# EAGLE board TSAL_2016 (EAGLE 7.5.0)
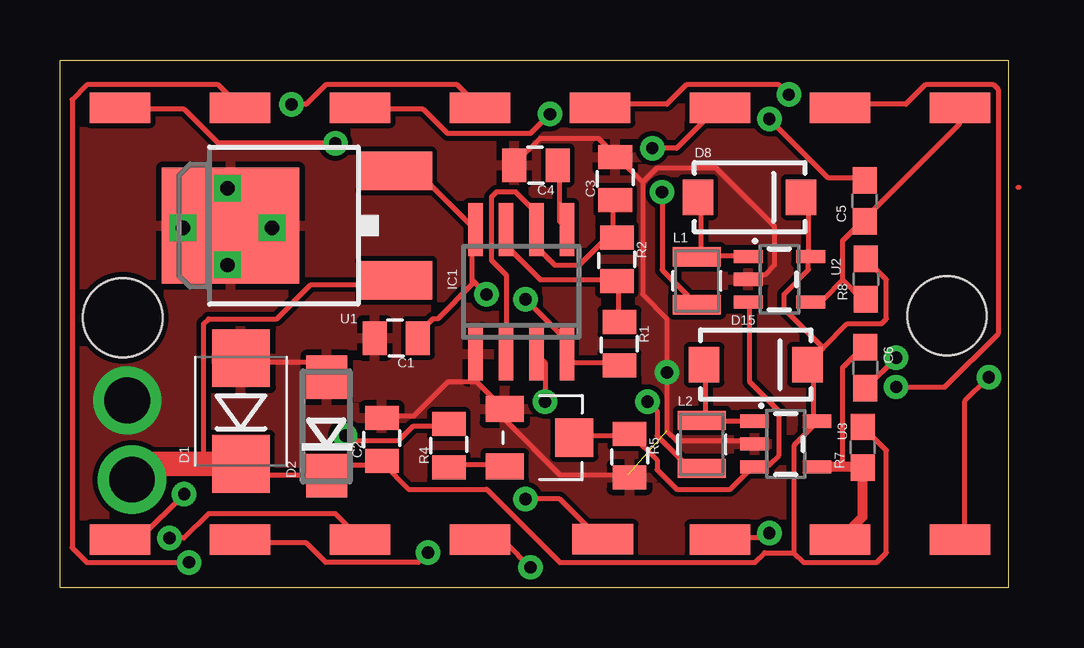
[diagram p0: board, top side]
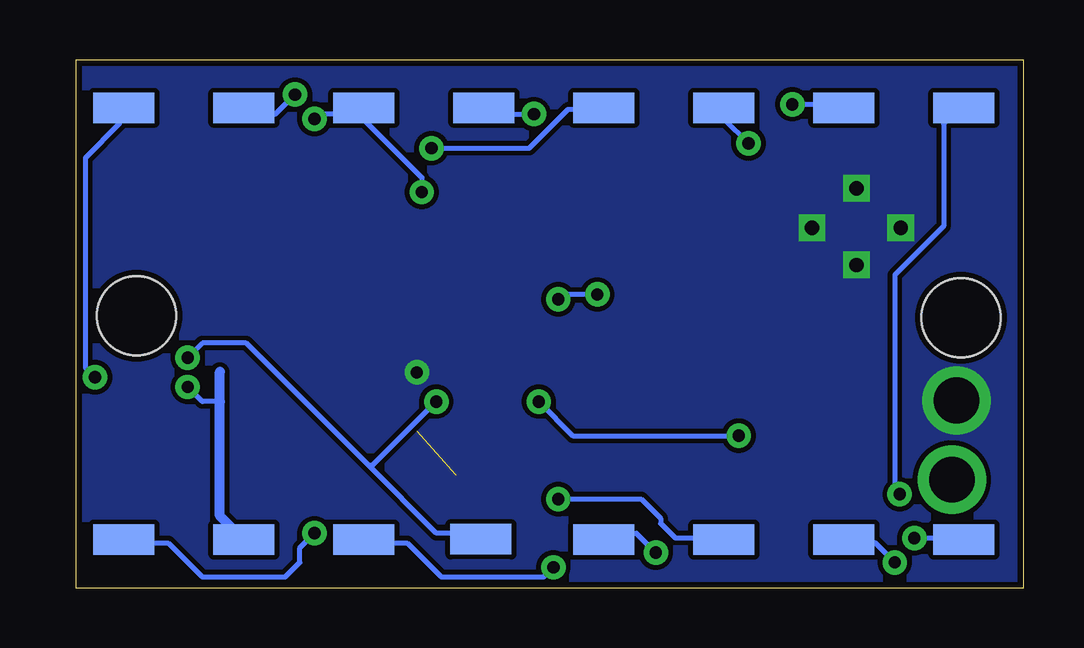
[diagram p1: board, bottom side, seen from below]

Size 39.5 x 22 mm. Coordinates in mm from the lower left corner, seen from the top.
Outline: 0,0 0,22 39.5,22 39.5,0 0,0
Copper layers (1*16): Top 0.035mm / dielectric 1.5mm / Bottom 0.035mm
Design rules "SparkFun": minimum track width 8mil, minimum drill 20mil, track to track 8mil, track to pad 8mil, pad to pad 8mil, via to via 8mil, smd to smd 8mil, copper to edge 10mil, drill to drill 8mil, minimum pad ring 12mil, minimum via ring 10mil, stop-mask expansion 4mil, vias tented up to drill 25mil, thermal gap 10mil
Holes 3.3 mm at 2.62,11.25 36.97,11.34

## Footprints (pad centres in the part's own frame; a part is rotated, then mirrored left to right if it is on the bottom)
0805@1 = smd 1 x 1.4: 1 -0.9,0; 2 0.9,0
0603@1 = smd 1.1 x 1: 1 -0.85,0; 2 0.85,0
SMB-DIODE = smd 2.4 x 2.4: A 2.2,0; C -2.2,0
DO-214AC = smd 1.8 x 1.7: A 2.05,0; C -2.05,0
LED_TSAL = smd 2.54 x 1.27: A 0,0 | smd 2.54 x 1.27 bottom: B 0,0
SMA-DIODE = smd 1.27 x 1.47: A -2.15,0; C 2.15,0
SO08 = smd 0.6 x 2.2: 1 -1.905,-2.6; 2 -0.635,-2.6; 3 0.635,-2.6; 4 1.905,-2.6; 5 1.905,2.6; 6 0.635,2.6; 7 -0.635,2.6; 8 -1.905,2.6
1007 = smd 2 x 0.8: 1 0,1; 2 0,-1
22AR100KLFTR = smd 1.092 x 1.6: 1 1.194,-1.448; 3 -1.194,-1.448 | smd 1.6 x 1.6: 2 0,1.448
DPAK = smd 1.6 x 3: 1 -2.28,-4.04; 3 2.28,-4.04 | smd 4.826 x 5.715: 2 0,2.858
SOT23-5 = smd 0.55 x 1.2: 1 -0.95,-1.3; 2 0,-1.3; 3 0.95,-1.3; 4 0.95,1.3; 5 -0.95,1.3

## Placement (x,y rotation side)
C1  1uF  [0805@1]  14.01,10.4 180 top
C2  1uF  [0805@1]  13.41,6.17 90 top
C3  22uF  [0805@1]  23.13,17.05 90 top
C4  1uF  [0805@1]  19.84,17.61 180 top
C5  2.2 uF  [0603@1]  33.52,16.13 90 top
C6  2.2uF  [0603@1]  33.55,9.17 270 top
D1  DIODE-ZENERSMB  [SMB-DIODE]  7.54,7.36 90 top
D2  TVS  [DO-214AC]  11.12,6.72 90 top
D3  LED_TSALLED  [LED_TSAL]  27.5,20 0 top
D4  LED_TSALLED  [LED_TSAL]  17.5,20 0 top
D5  LED_TSALLED  [LED_TSAL]  7.5,20 0 top
D6  LED_TSALLED  [LED_TSAL]  7.5,2 0 top
D7  LED_TSALLED  [LED_TSAL]  17.5,2 0 top
D8  B340A  [SMA-DIODE]  28.73,16.28 0 top
D9  LED_TSALLED  [LED_TSAL]  27.5,2 0 top
D10  LED_TSALLED  [LED_TSAL]  37.5,2 0 top
D11  LED_TSALLED  [LED_TSAL]  37.5,20 0 top
D12  LED_TSALLED  [LED_TSAL]  22.62,2.02 0 top
D13  LED_TSALLED  [LED_TSAL]  12.5,2 0 top
D14  LED_TSALLED  [LED_TSAL]  2.5,2 0 top
D15  B340A  [SMA-DIODE]  28.99,9.29 0 top
D16  LED_TSALLED  [LED_TSAL]  2.5,20 0 top
D17  LED_TSALLED  [LED_TSAL]  12.5,20 0 top
D18  LED_TSALLED  [LED_TSAL]  22.5,20 0 top
D19  LED_TSALLED  [LED_TSAL]  32.5,20 0 top
D20  LED_TSALLED  [LED_TSAL]  32.5,2 0 top
IC1  LM555D  [SO08]  19.21,12.33 0 top
L1  33uH  [1007]  26.54,12.79 0 top
L2  33uH  [1007]  26.74,5.97 0 top
POT1  22AR100KLFTR  [22AR100KLFTR]  19.98,6.25 270 top
R1  2k  [0805@1]  23.31,10.16 270 top
R2  10k  [0805@1]  23.2,13.69 270 top
R4  10k  [0805@1]  16.2,5.92 90 top
R5  10k  [0805@1]  23.73,5.5 270 top
R7  499  [0603@1]  33.45,5.85 90 top
R8  499  [0603@1]  33.58,12.86 90 top
U1  NCV7805BDTRKG  [DPAK]  9.96,15.1 90 top
U2  AL8805WS  [SOT23-5]  29.98,12.85 270 top
U3  AL8805WS  [SOT23-5]  30.24,5.99 270 top

## Library data of the parts
C1 C2 C4 = FSAE Electric; PARTNO: UMK212F105ZG-T
C3 = FSAE Electric; PARTNO: CL21A226MQCLQNC
C5 C6 = FSAE Electric; PARTNO: EMK107F225ZA-T
D1-D7 D9-D14 D16-D20 IC1 = FSAE Electric
D8 D15 = FSAE Electric; PROD_ID: DIO-09886
L1 L2 = FSAE Electric; PARTNO: CB2518T330K
POT1 = FSAE Electric; PARTNO: 22AR100KLFTR
R1 = FSAE Electric; PARTNO: RC0805FR-072KL
R2 R4 R5 = FSAE Electric; PARTNO: RC0805FR-0710KL
R7 R8 = FSAE Electric; PARTNO: RC0603FR-07499RL
U1 = FSAE Electric; PARTNO: NCV7805BDTRKG
U2 U3 = FSAE Electric; PROD_ID: IC-11626

## Nets
+5V: C1.1 IC1.4 IC1.8 R1.2 U1.3
+24V: C2.1 D1.C D2.C D8.C D15.C R7.2 R8.2 U1.1 U2.5 U3.5
GND: C1.2 C2.2 C3.2 C4.2 D1.A D2.A IC1.1 POT1.3 R5.2 U1.2 U2.2 U3.2
N$1: C6.1 D20.A R7.1 U3.4
N$2: POT1.2 R5.1 U2.3 U3.3
N$3: D17.A D18.B
N$4: C4.1 IC1.5
N$5: IC1.7 R1.1 R2.2
N$7: D15.A L2.1 U3.1
N$8: C5.1 D11.A R8.1 U2.4
N$9: D10.A D11.B
N$10: C3.1 IC1.2 IC1.6 R2.1
N$11: D18.A D19.B
N$12: D9.A D10.B
N$13: D7.A D9.B
N$14: C6.2 D12.B L2.2
N$15: D6.A D7.B
N$16: D5.A D6.B
N$17: D19.A D20.B
N$18: D12.A D13.B
N$19: C5.2 D3.B L1.2
N$20: D13.A D14.B
N$21: D16.A D17.B
N$22: D14.A D16.B
N$23: D4.A D5.B
N$24: D3.A D4.B
N$26: D8.A L1.1 U2.1
N$27: POT1.1 R4.1
N$28: IC1.3 R4.2

## Tracks (layer width: path | path; a pad name or v marks a point on that pad's centre or on a via)
+5V  (via drill 0.51)
  Top 0.203: R1.2 23.26,9.38 21.43,9.38 21.23,9.58 IC1.4 21.02,9.79 21.02,10.39 v19.4,12.02 | 17.16,12.83 17.16,14.87 IC1.8 17.16,15.07 14.93,17.3 14.11,17.3 U1.3 | 17.16,12.83 17.16,12.63 15.74,11.21 15.54,11.21 14.93,10.6 C1.1 | 17.16,12.83 v17.77,12.22
  Bottom 0.203: v19.4,12.02 19.19,12.22 v17.77,12.22
+24V  (via drill 1.9)
  Top 0.203: 30.57,1.45 30.98,1.05 34.03,1.05 34.43,1.45 34.43,5.72 33.62,6.53 R7.2 | 30.57,1.45 30.57,5.92 31.39,6.74 U3.5 31.39,6.94 31.39,8.97 31.18,9.18 D15.C 31.18,9.38 31.79,9.99 | D8.C 31.18,16.09 31.18,13.85 U2.5 31.18,13.65 31.18,13.24 30.17,12.22 30.17,11.61 31.79,9.99 | 31.79,9.99 32.81,11.01 34.23,11.01 34.43,11.21 34.43,12.83 33.62,13.65 R8.2 | D1.C 8.02,5.11 8.43,4.71 11.07,4.71 D2.C 11.27,4.71 11.68,5.11 13.3,5.11 C2.1 13.51,5.11 14.52,4.1 17.77,4.1 20.82,1.05 28.95,1.05 29.35,1.45 30.57,1.45 | 5.99,5.16 5.99,11.01 6.19,11.21 9.03,11.21 10.46,12.63 13.91,12.63 U1.1
  Top 0.406: D8.C 31,16.28 31,16
  Top 1.016: v3,4.5 3.65,5.16 5.99,5.16 D1.C
GND  (via drill 0.51, 0.6, 1.9)  (1 unrouted)
  Top 0.203: 24.27,16.9 24.27,12.22 25.29,11.21 v25.29,8.97 25.29,6.53 25.7,6.13 28.75,6.13 U3.2 | 24.27,16.9 23.26,17.91 C3.2 23.05,18.12 22.45,18.73 20.01,18.73 18.99,17.71 C4.2 | 24.27,16.9 24.88,17.51 27.32,17.51 29.76,15.07 29.76,13.44 29.35,13.04 28.75,13.04 U2.2 | U1.2 7,15.27 7,16.49 v6.98,16.65 | D1.A 7.61,9.38 10.66,9.38 11.07,8.97 D2.A | R5.2 23.66,4.71 20.82,4.71 18.59,6.94 18.59,7.35 POT1.3 18.38,7.55 17.37,8.57 | 17.37,8.57 17.37,9.58 IC1.1 | 17.37,8.57 16.15,8.57 14.72,7.14 13.51,7.14 C2.2
  other vias: 2.8,7.8 5.13,15 8.83,15 6.98,13.45
  pour Bottom: -0.5,22 -0.5,0 40.5,0 40.5,22
  pour Bottom: -0.5,22 -0.5,0 40.5,0 40.5,22
  pour Top: -0.5,21 -0.5,0 40.5,0 40.5,22 -0.5,22
N$1
  Top 0.203: 32.61,5.04 32.61,9.18 33.42,9.99 C6.1
  Top 0.406: D20.A 33.45,2.95 R7.1 33.41,5.04 32.61,5.04 U3.4
N$2
  Top 0.203: U2.3 28.75,11.82 28.75,8.57 29.96,7.35 29.96,5.52 29.56,5.11 28.95,5.11 U3.3 28.75,4.91 27.93,4.1 25.7,4.1 24.88,4.91 24.88,5.32 23.87,6.33 R5.1 23.66,6.33 21.43,6.33 POT1.2
N$3  (via drill 0.51)
  Top 0.203: v20.41,19.74 19.6,18.93 16.15,18.93 15.13,19.95 12.69,19.95 D17.A
  Bottom 0.203: v20.41,19.74 22.24,19.74 D18.B
N$4
  Top 0.203: C4.1 20.82,17.51 20.82,15.27 21.02,15.07 IC1.5
N$5
  Top 0.203: R1.1 23.26,11.21 23.26,12.63 R2.2 23.05,12.83 20.01,12.83 18.59,14.26 18.59,14.87 IC1.7
N$7
  Top 0.203: U3.1 28.75,6.94 26.92,6.94 L2.1 26.92,7.14 26.92,9.18 D15.A
N$8
  Top 0.203: 32.61,12.83 32.61,14.46 33.42,15.27 C5.1 33.62,15.48 37.48,19.34 37.48,19.95 D11.A | 32.61,12.83 33.42,12.02 R8.1 | 32.61,12.83 31.79,12.02 31.39,12.02 U2.4
N$9  (via drill 0.51)
  Top 0.203: v38.7,8.77 37.69,7.75 37.69,2.06 D10.A
  Bottom 0.203: v38.7,8.77 39.11,9.18 39.11,17.91 37.69,19.34 37.69,19.95 D11.B
N$10
  Top 0.203: C3.1 23.05,16.09 23.05,14.66 R2.1 23.05,14.46 22.65,14.46 21.63,13.44 20.62,13.44 20.01,14.05 20.01,14.87 IC1.6 19.8,15.07 19.8,15.68 18.99,16.49 18.18,16.49 17.98,16.29 17.98,13.65 18.59,13.04 18.59,9.79 IC1.2
N$11  (via drill 0.51)
  Top 0.203: v30.37,20.55 29.96,20.96 26.1,20.96 25.29,20.15 22.65,20.15 D18.A
  Bottom 0.203: v30.37,20.55 31.18,19.74 32.2,19.74 32.4,19.95 D19.B
N$12  (via drill 0.51)
  Top 0.203: v29.56,2.27 29.35,2.06 27.53,2.06 D9.A
  Bottom 0.203: v29.56,2.27 30.17,1.66 30.17,1.05 30.78,0.44 34.23,0.44 35.65,1.86 37.48,1.86 D10.B
N$13  (via drill 0.51)
  Top 0.203: v19.6,0.85 18.59,1.86 17.57,1.86 D7.A
  Bottom 0.203: v19.6,0.85 20.01,0.44 24.27,0.44 25.7,1.86 27.32,1.86 D9.B
N$14  (via drill 0.51)
  Top 0.203: v34.84,9.58 33.62,8.36 C6.2 | v24.48,7.75 24.88,7.35 24.88,6.33 26.1,5.11 26.71,5.11 L2.2
  Bottom 0.203: v34.84,9.58 34.23,10.19 32.4,10.19 27.32,5.11 | 27.32,5.11 24.48,2.27 22.85,2.27 22.65,2.06 D12.B | v24.48,7.75 27.12,5.11 27.32,5.11
N$15  (via drill 0.51)
  Top 0.203: v15.33,1.45 14.93,1.05 11.07,1.05 10.25,1.86 7.61,1.86 D6.A
  Bottom 0.203: v15.33,1.45 16.15,2.27 17.16,2.27 17.37,2.06 D7.B
N$16  (via drill 0.51)
  Top 0.203: v5.38,1.05 1.11,1.05 0.5,1.66 0.5,20.35 1.11,20.96 6.6,20.96 7.41,20.15 D5.A
  Bottom 0.203: v5.38,1.05 6.19,1.86 7.41,1.86 D6.B
N$17  (via drill 0.51)
  Top 0.203: v34.84,8.36 36.87,8.36 39.11,10.6 39.11,20.76 38.91,20.96 36.06,20.96 35.25,20.15 32.61,20.15 D19.A
  Bottom 0.203: v34.84,8.36 34.23,7.75 33.5,7.75
  Bottom 0.406: D20.B 33.5,3 33.5,7.75 33.5,9
N$18  (via drill 0.51)
  Top 0.203: v19.4,3.69 20.82,3.69 22.45,2.06 D12.A
  Bottom 0.203: v19.4,3.69 15.94,3.69 15.13,2.88 15.13,2.67 14.52,2.06 12.69,2.06 D13.B
N$19  (via drill 0.51)
  Top 0.203: v29.56,19.54 32,17.1 33.42,17.1 C5.2 | v25.09,16.49 25.09,13.24 26.51,11.82 L1.2
  Bottom 0.203: v29.56,19.54 29.35,19.74 27.73,19.74 | 27.73,19.74 27.53,19.95 D3.B 27.73,19.74 | v25.09,16.49 25.09,17.1 27.73,19.74
N$20  (via drill 0.51)
  Top 0.203: v4.56,2.06 5.17,2.06 6.19,3.08 11.47,3.08 12.49,2.06 D13.A
  Bottom 0.203: v4.56,2.06 2.53,2.06 D14.B
N$21  (via drill 0.51)
  Top 0.203: v11.47,18.52 6.6,18.52 5.17,19.95 2.53,19.95 D16.A
  Bottom 0.203: v11.47,18.52 12.49,19.54 12.49,19.95 D17.B
N$22  (via drill 0.51)
  Top 0.203: v5.17,3.89 3.35,2.06 2.53,2.06 D14.A
  Bottom 0.203: v5.17,3.89 5.38,4.1 5.38,13.04 3.35,15.07 3.35,19.34 2.53,20.15 D16.B
N$23  (via drill 0.51)
  Top 0.203: v9.64,20.15 10.25,20.15 11.07,20.96 16.55,20.96 17.37,20.15 D4.A
  Bottom 0.203: v9.64,20.15 7.61,20.15 D5.B
N$24  (via drill 0.51)
  Top 0.203: v24.68,18.32 25.7,18.32 27.32,19.95 D3.A
  Bottom 0.203: v24.68,18.32 20.62,18.32 18.99,19.95 17.57,19.95 D4.B
N$26
  Top 0.203: 26.71,13.85 28.54,13.85 U2.1 | 26.71,13.85 26.71,16.09 D8.A | 26.71,13.85 L1.1
N$27
  Top 0.203: R4.1 16.35,5.11 18.38,5.11 POT1.1
N$28  (via drill 0.51)
  Top 0.203: v11.88,6.33 12.08,6.13 14.11,6.13 14.72,6.74 16.15,6.74 R4.2 | v20.21,7.75 20.21,9.38 20.01,9.58 IC1.3
  Bottom 0.203: 18.79,6.33 v11.88,6.33 18.79,6.33 | v20.21,7.75 18.79,6.33
N$32
  Top 0.203: 39.92,16.69 39.96,16.69